# Altium PCB PCB3.PcbDoc
Units mm, origin at the board's own origin, x right, y up, seen from the top; angles counter-clockwise.
Board outline 106 x 106 mm, 2 copper layers (Top Layer, Bottom Layer), stack 2.971 mm thick; 27 components, 45 nets, 204 pads, 52 vias.
Unrouted connection lines stored in the file: 113.
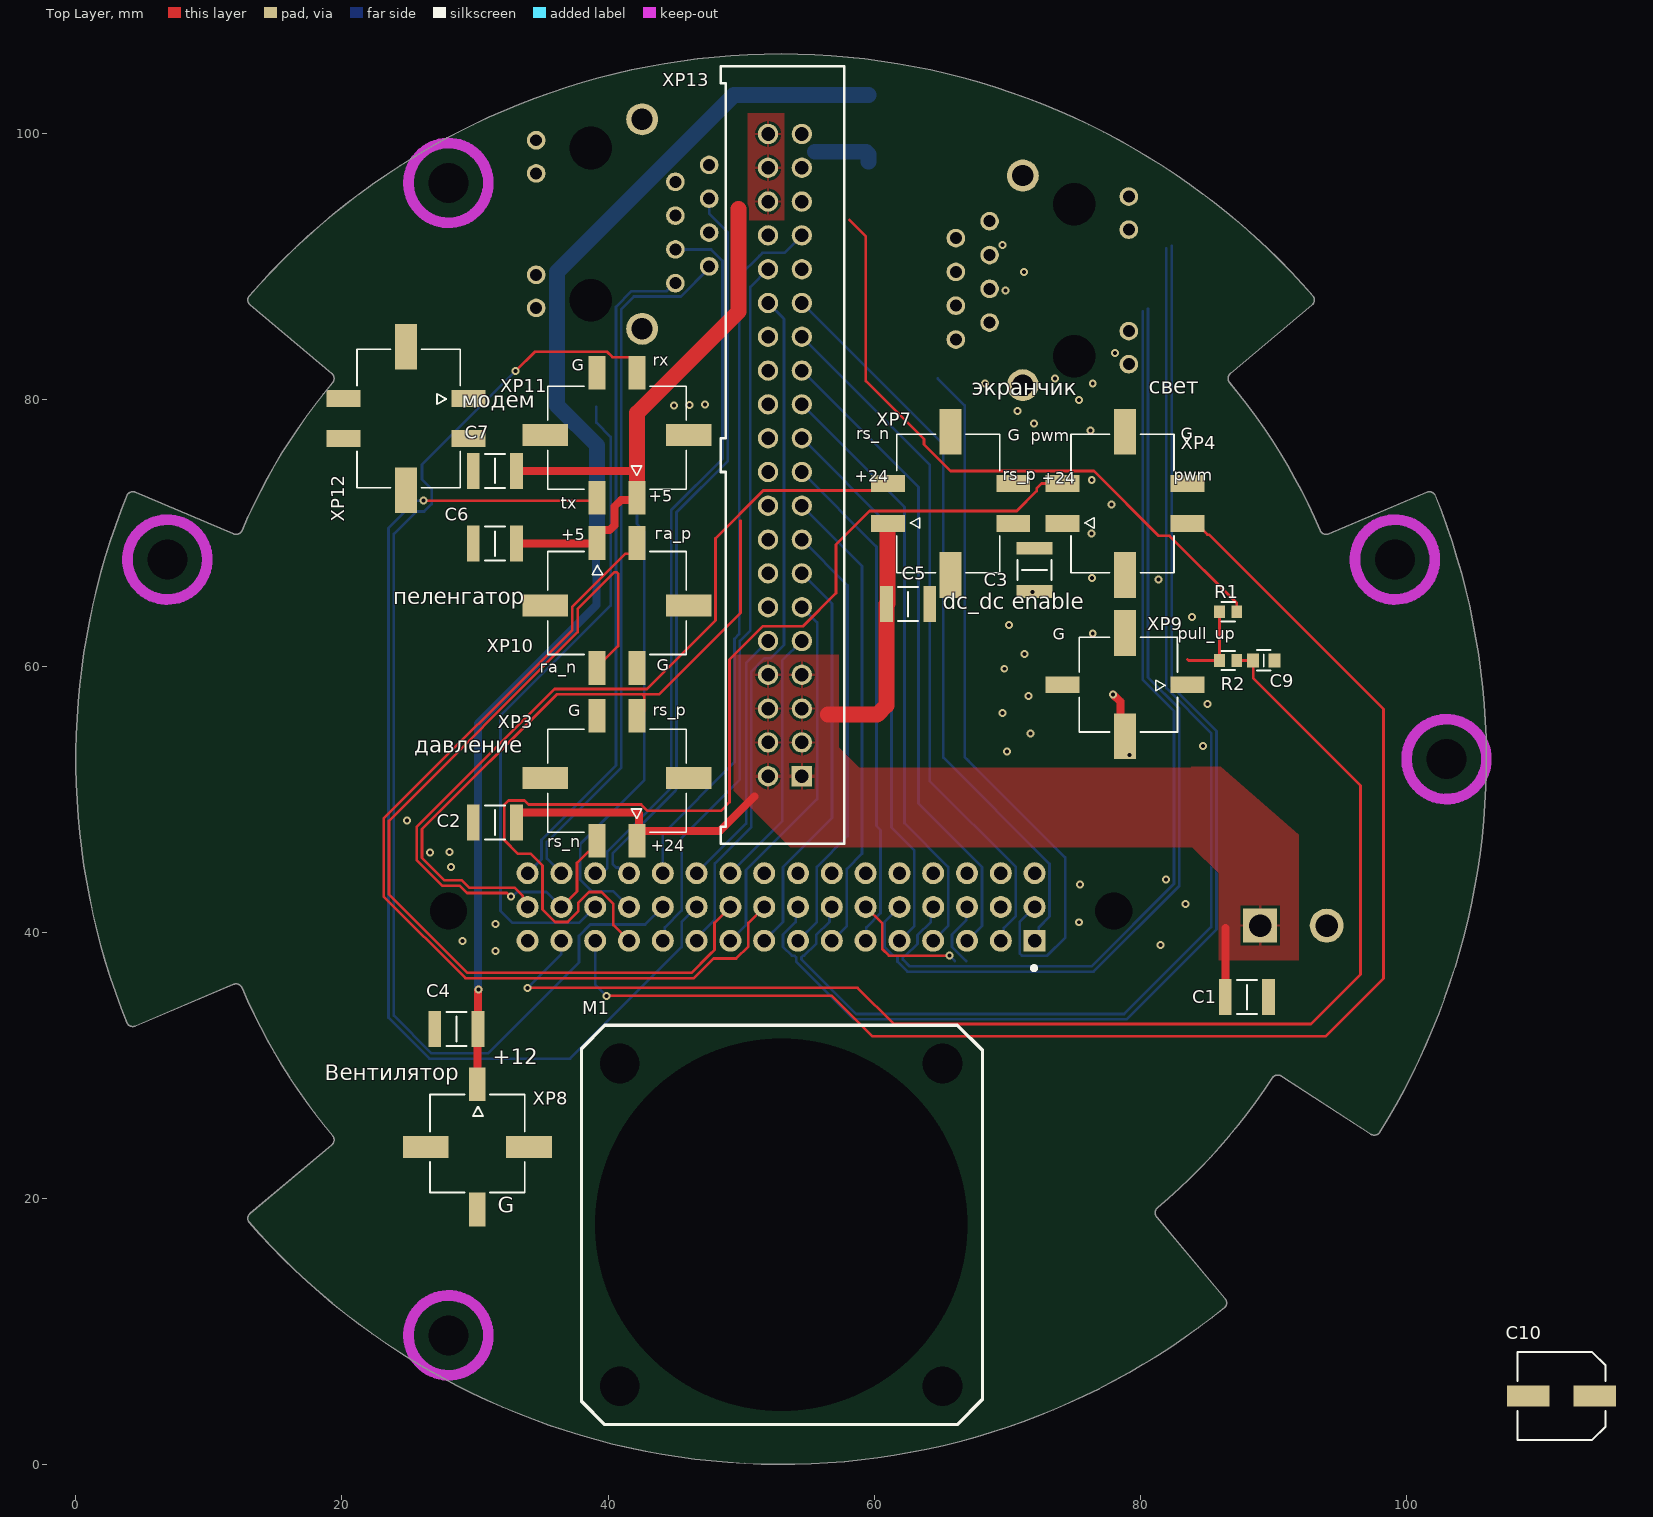
[diagram p0: Top Layer view]
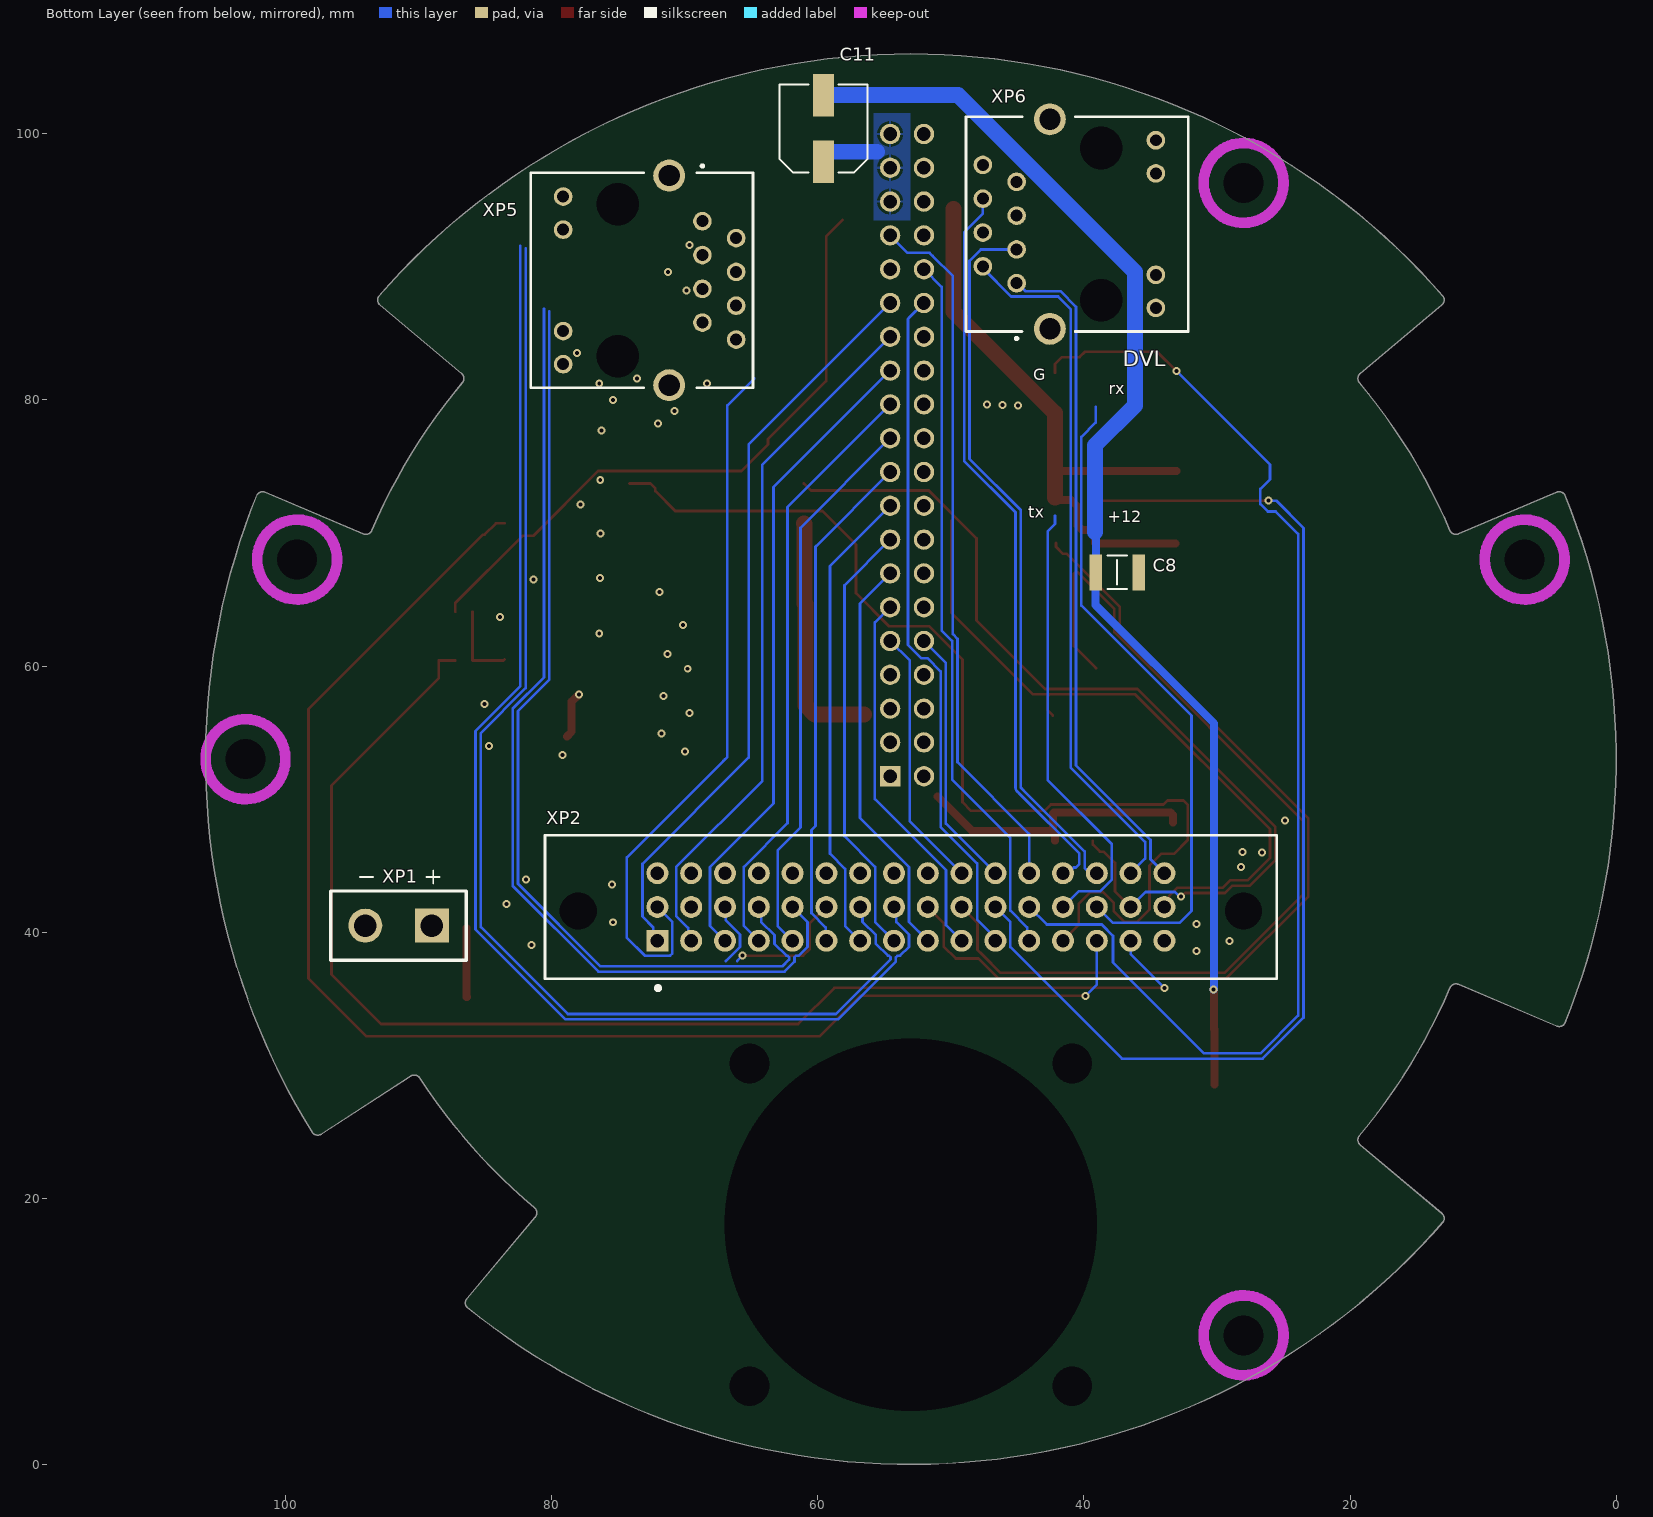
[diagram p1: Bottom Layer view, seen from below]
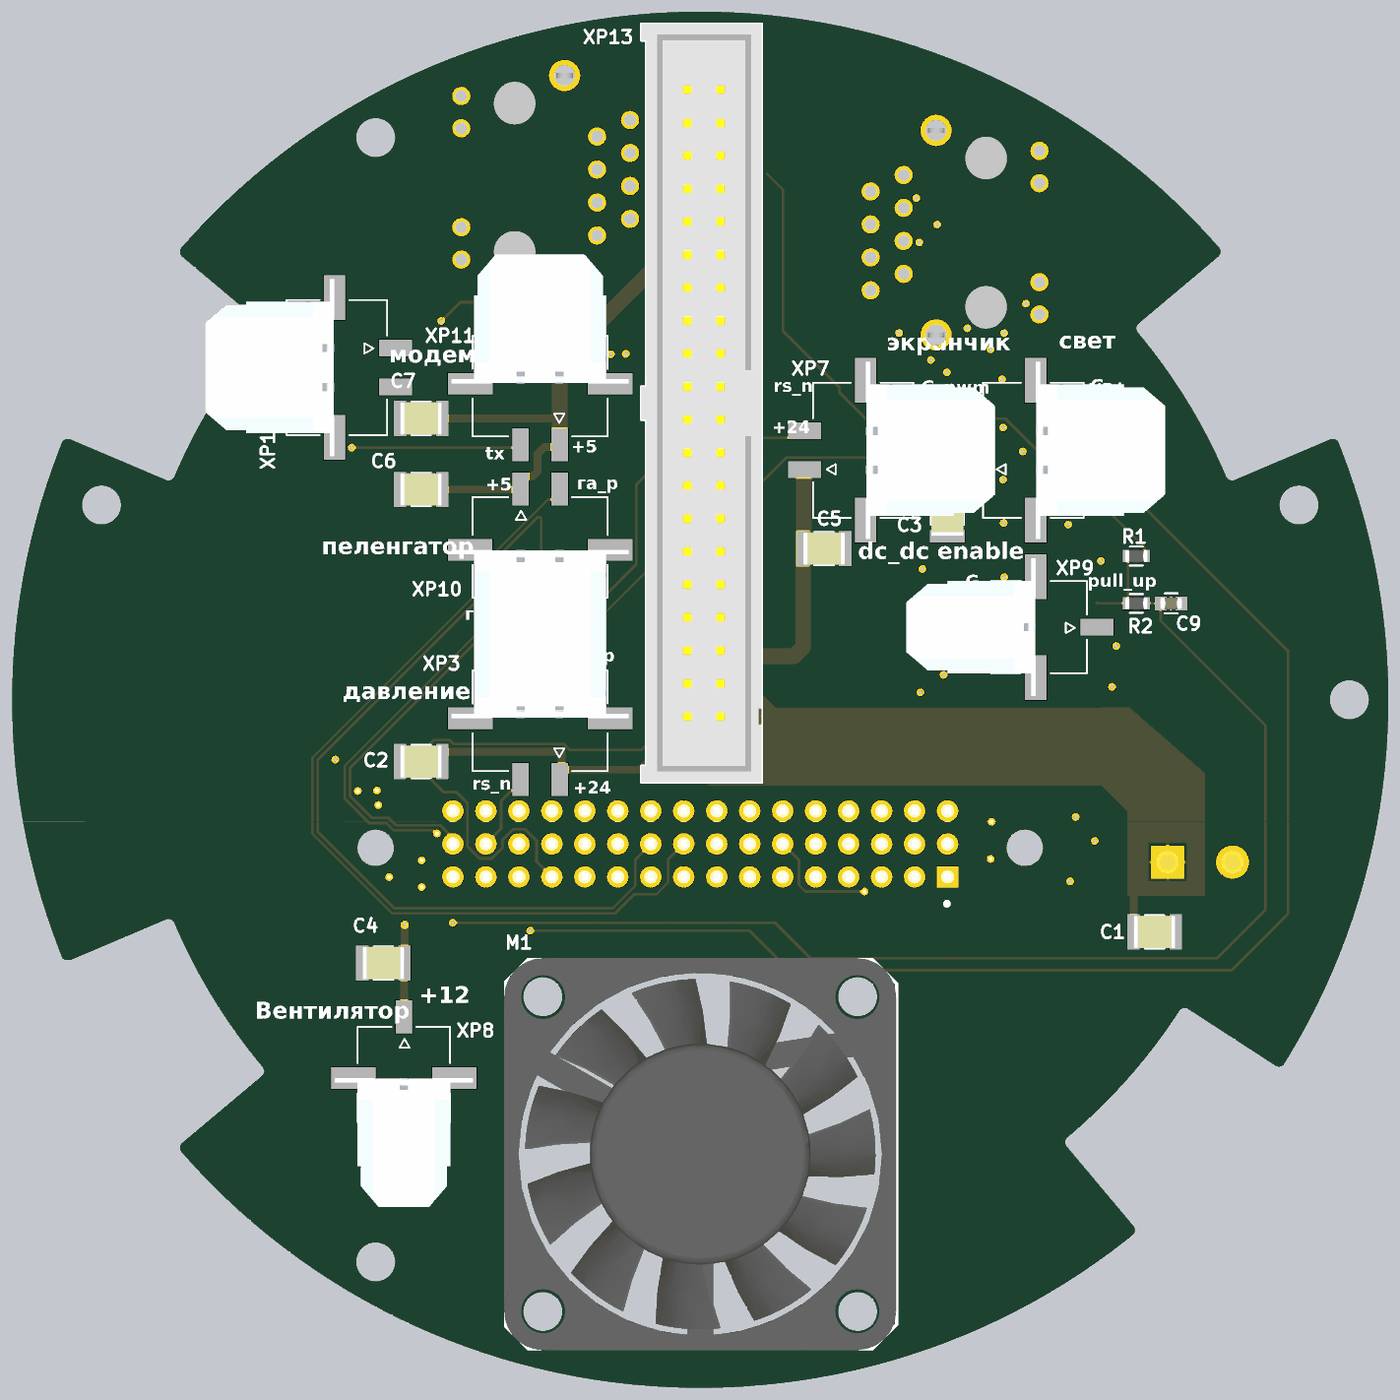
[diagram p2: 3D render of the assembled board from above, using the file's embedded part models]
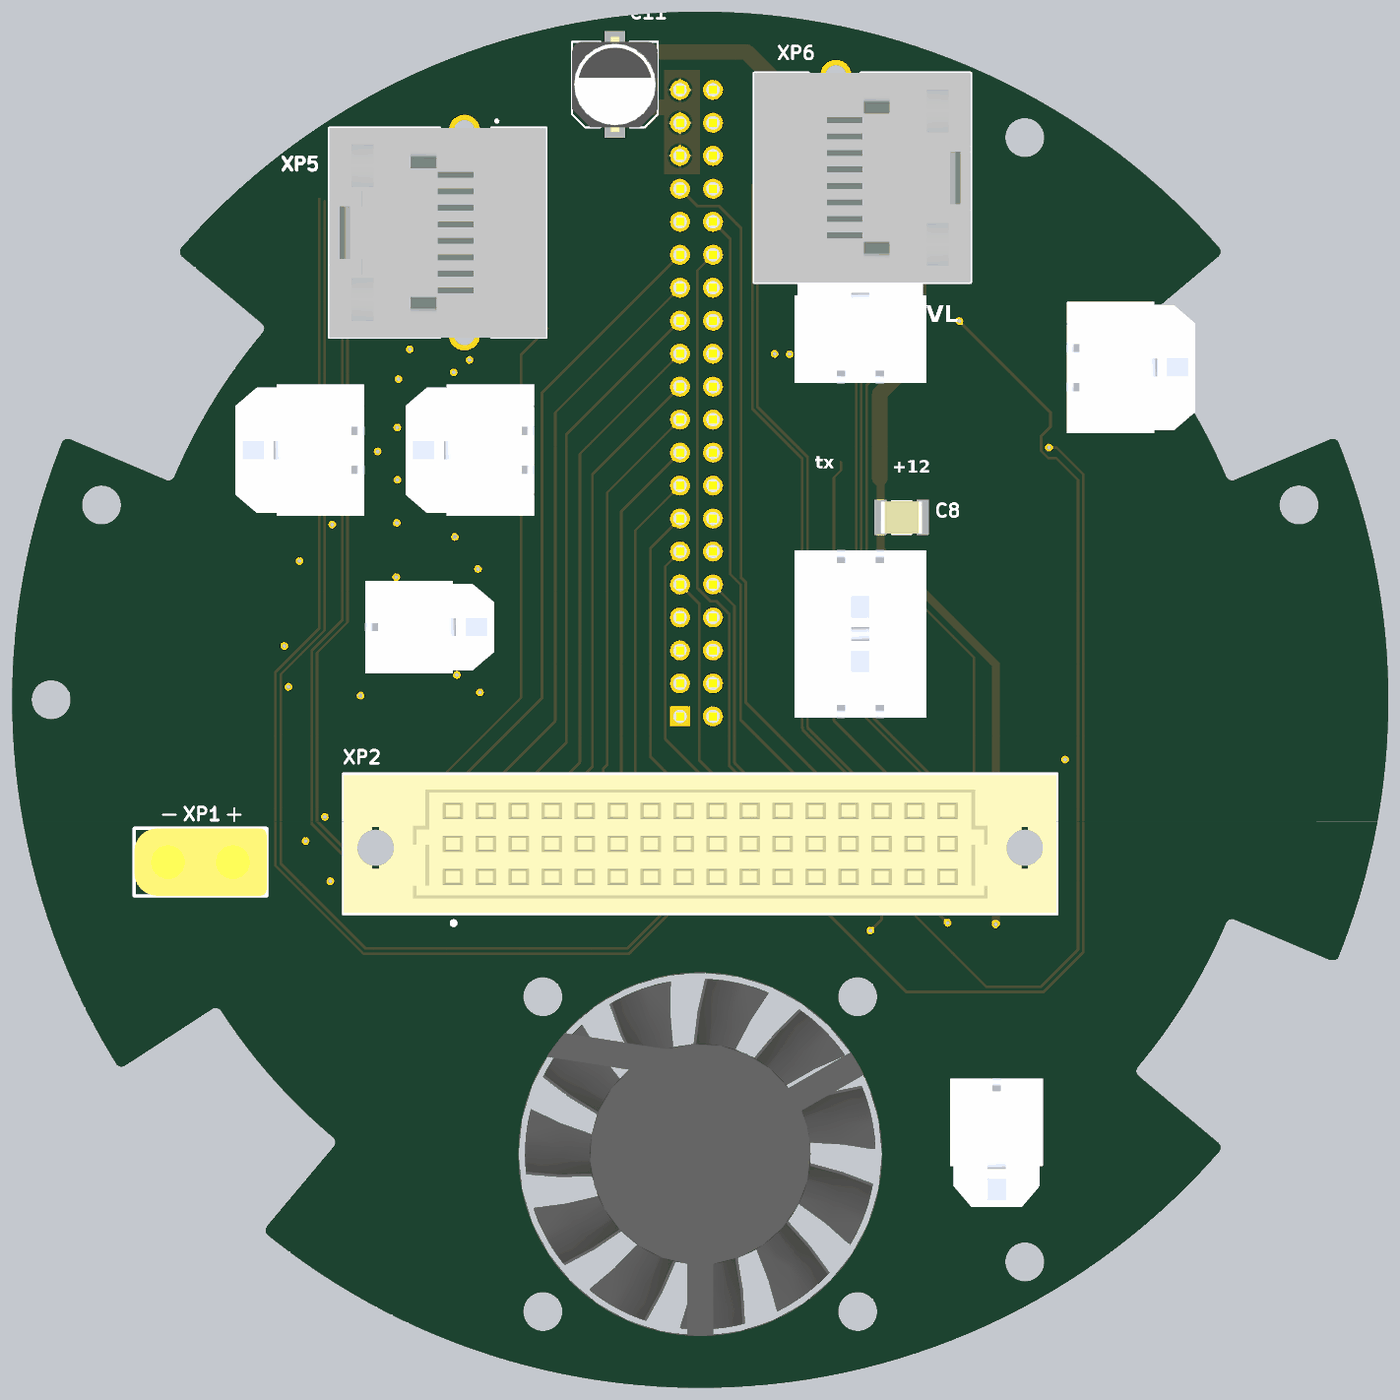
[diagram p3: 3D render of the assembled board from below, using the file's embedded part models]

## Layer stack, top to bottom
Top Solder: solder mask 0.0102, Solder Resist, Dk 3.5
Top Layer: signal copper 0.0356
Dielectric 1: dielectric 2.9, FR-4, Dk 4.8
Bottom Layer: signal copper 0.0356
Bottom Solder: solder mask 0.0102, Solder Resist, Dk 3.5

## Board outline
4.485,32.953 cw(c4.29,33.414) 3.87,33.142 cw(c53.006,53.006) 3.87,72.87 cw(c4.29,72.599) 4.485,73.059 11.849,69.934 ccw(c12.044,70.394) 12.504,70.199 cw(c53.007,53.006) 19.301,81.289 ccw(c18.918,81.61) 19.239,81.993 13.111,87.135 cw(c13.433,87.518) 13,87.77 13,87.769 cw(c53.007,53.006) 93.013,87.77 cw(c92.58,87.518) 92.902,87.135 86.774,81.993 ccw(c87.095,81.61) 86.712,81.289 cw(c53.006,53.006) 93.509,70.199 ccw(c93.969,70.394) 94.164,69.934 101.528,73.059 cw(c101.723,72.599) 102.143,72.87 cw(c53.006,53.006) 97.947,24.912 97.948,24.912 cw(c97.581,25.252) 97.309,24.832 90.6,29.189 ccw(c90.327,28.77) 89.908,29.042 cw(c53.007,53.006) 81.289,19.3 ccw(c81.611,18.917) 81.228,18.596 86.37,12.468 cw(c85.987,12.147) 86.369,11.824 cw(c53.007,53.006) 13,18.243 cw(c13.432,18.494) 13.111,18.877 19.239,24.019 ccw(c18.917,24.402) 19.3,24.724 cw(c53.006,53.006) 12.504,35.814 ccw(c12.044,35.619) 11.849,36.079

## Design rules (kind name [scope] priority, off if disabled: settings)
AcuteAngle [All] p1: minimum=3.50000000000000E+0001 checktracksonly=FALSE
BoardOutlineClearance "BoardOutlineClearance 1" [All] p1: gap=0.25 ignorepadtopadclearanceinfootprint=FALSE except(0: Arc-SplitContinuation Track-SplitContinuation SMDPad-SplitContinuation THPad-SplitContinuation Via-SplitContinuation Fill-SplitContinuation Poly-SplitContinuation Region-SplitContinuation Text-SplitContinuation) // Milling
BoardOutlineClearance "BoardOutlineClearance 2" [All] p2: gap=0.4 ignorepadtopadclearanceinfootprint=FALSE except(0: Arc-SplitContinuation Track-SplitContinuation SMDPad-SplitContinuation THPad-SplitContinuation Via-SplitContinuation Fill-SplitContinuation Poly-SplitContinuation Region-SplitContinuation Text-SplitContinuation) // V-Cut
Clearance "Clearance-1 1 Oz" [All] p1: gap=0.2 ignorepadtopadclearanceinfootprint=FALSE except(0.25: Arc-Hole Track-Hole SMDPad-Hole THPad-Hole Via-Hole Fill-Hole Poly-Hole Region-Hole Text-Hole) // Standart
DiffPairsRouting "DiffPairsRouting 1 Oz" [All] p1: maxlimit=0.254 minlimit=0.2 mostfreqgap=0.254 toplayer_minwidth=0.2 toplayer_maxwidth=0.381 toplayer_prefwidth=0.381 bottomlayer_minwidth=0.2 bottomlayer_maxwidth=0.381 bottomlayer_prefwidth=0.381 maxuncoupledlength=12.7
HoleSize [HasPad('M1-0')] p1: absolutevalues=TRUE maxlimit=50 minlimit=0.025 maxpercent=80.000 minpercent=20.000
HoleSize "Minimum HoleSize" [IsPad] p2: absolutevalues=TRUE maxlimit=5.9 minlimit=0.6 maxpercent=80.000 minpercent=20.000
HoleSize "Minimum HoleSize VIA 1" [IsVia] p3: absolutevalues=TRUE maxlimit=5.9 minlimit=0.3 maxpercent=80.000 minpercent=20.000 // Standart
HoleToHoleClearance Hole2HoleClearance [All] p1: gap=0.25 allowstackedmicrovias=FALSE
MinimumAnnularRing "Minimum AR VIA Standart" [IsVia] p1: minimumring=0.15
MinimumAnnularRing "Minimum AR PAD Standart" [IsPAD] p2: minimumring=0.2
MinimumSolderMaskSliver "SolderMask Bridge Standart" [All] p1: minsoldermaskwidth=0.15 // All Masks
PlaneClearance "PlaneClearance 1 Oz" [All] p1: clearance=0.2
PlaneConnect "TermalConnect-1 1 Oz" [All] p1: planeconnectstyle=Relief reliefexpansion=0.2 reliefentries=4 reliefconductorwidth=0.2 reliefairgap=0.2 // Standart
PolygonConnect "PolygonConnect-1 1 Oz" [All] p1: thpad.connectstyle=Relief thpad.reliefconductorwidth=0.2 thpad.reliefentries=4 thpad.polygonreliefangle="90 Angle" thpad.airgapwidth=0.2 smdpad.connectstyle=Relief smdpad.reliefconductorwidth=0.2 smdpad.reliefentries=4 smdpad.polygonreliefangle="90 Angle" smdpad.airgapwidth=0.2 via.connectstyle=Direct via.reliefconductorwidth=0.254 via.reliefentries=4 via.polygonreliefangle="90 Angle" via.airgapwidth=0.254 // Standart
RoutingCorners [All] p1 off: cornerstyle=45-Degree minsetback=2.54 maxsetback=2.54
RoutingVias [All] p1: holewidth=0.3 width=0.6 viastyle="Through Hole" minholewidth=0.2 minwidth=0.4 maxholewidth=5.9 maxwidth=6.4
SilkToSilkClearance Silk2SilkClearance [All] p1 off: silktosilkclearance=0.15
SilkToSolderMaskClearance Silk2SolderMaskClearance [IsPad] p1 off: minsilkscreentomaskgap=0.15 clearancetoexposedcopper=TRUE
SolderMaskExpansion SolderMaskExpansion-1 [All] p1: expansion=0.05 istentingtop=FALSE // Standart
SupplyNets "Schematic Supply Nets_5" [InNet('+5')] p1: voltage=0.000
SupplyNets "Schematic Supply Nets_4" [InNet('+24_1')] p2: voltage=0.000
SupplyNets "Schematic Supply Nets_3" [InNet('GND')] p3: voltage=0.000
SupplyNets "Schematic Supply Nets_2" [InNet('+24_2')] p4: voltage=0.000
SupplyNets "Schematic Supply Nets_1" [InNet('+12')] p5: voltage=0.000
SupplyNets "Schematic Supply Nets" [InNet('+24')] p6: voltage=0.000
UnRoutedNet [All] p1: checkbadconnections=TRUE
Width "Width 1 Oz" [All] p1: maxlimit=1.2 minlimit=0.2 preferedwidth=0.6 checkconnectedcopper=TRUE
20 further rules are at their usual default settings.

## Classes and differential pairs
differential pair eth6: +eth6_P -eth6_N
differential pair eth5: +eth5_P -eth5_N
differential pair RS485: +RS485_P -RS485_N
differential pair GA: +GA_P -GA_N
differential pair eth4: +eth4_P -eth4_N
differential pair eth3: +eth3_P -eth3_N
differential pair eth2: +eth2_P -eth2_N
differential pair eth1: +eth1_P -eth1_N

## Components (designator, comment, footprint, x,y, rotation, side; value= is the part's Value field where it differs from the comment)
C1 "Capacitor" 1210C 88,35.125 r180 top value="22 мк"
C2 "Capacitor" 1210C 31.5,48.25 r0 top value="22 мк"
C3 "Capacitor" 1210C 72.05,67.225 r90 top value="22 мк"
C4 "Capacitor" 1210C 28.6,32.725 r0 top value="22 мк"
C5 "Capacitor" 1210C 62.55,64.65 r180 top value="22 мк"
C6 "Capacitor" 1210C 31.5,69.2 r0 top value="22 мк"
C7 "Capacitor" 1210C 31.5,74.675 r0 top value="22 мк"
C8 "Capacitor" 1210C 37.5,67.05 r0 bottom value="22 мк"
C9 "Capacitor" 0603C 89.275,60.425 r180 top value="0,1 мк"
C10 "Capacitor" ECAP_SMD_6,6x6,6 111.655,5.15 r180 top value="100 мк"
C11 "Capacitor" ECAP_SMD_6,6x6,6 59.575,100.4 r90 bottom value="100 мк"
M1 "cooler3030" cooler3030 53.006,18.006 r0 top locked
R1 "Resistor" 0603R 86.6,64.075 r180 top value="1,0 к"
R2 "Resistor" 0603R 86.6,60.425 r180 top value="1,0 к"
XP1 "XT30UPB-F" XT30UPB-F 91.506,40.5 r0 bottom locked
XP2 "DIN41612_48_3row_straight_female" DIN41612_48_3row_straight_female 53.006,41.9 r0 bottom locked
XP3 "430450418" MOLEX_430450418 40.675,51.575 r0 top
XP4 "430450418" MOLEX_430450418 78.85,72.225 r270 top
XP5 "1734577-3" 1-1734577-3-rj45-8p8c 68.675,93.43 r90 bottom
XP6 "1734577-3" 1-1734577-3-rj45-8p8c 45.06,88.77 r270 bottom
XP7 "430450418" MOLEX_430450418 65.75,72.225 r270 top
XP8 "430450218" Molex_430450218 30.175,23.875 r180 top
XP9 "430450218" Molex_430450218 78.85,58.6 r90 top
XP10 "430450418" MOLEX_430450418 40.675,64.55 r180 top
XP11 "430450418" MOLEX_430450418 40.675,77.35 r0 top
XP12 "430450418" MOLEX_430450418 24.825,78.6 r90 top
XP13 "IDC_40_Male conector" "IDC_40_Male conector" 53.295,75.855 r90 top locked

## Footprints (in the part's own frame and the unit in brackets; to place one, negate y for a bottom-side part, rotate by r counter-clockwise, add the part's x,y. Pads: shape width x height; smd on the part's side, far side on the other; paste and mask are expansions set on the pad)
1-1734577-3-rj45-8p8c [mm]
  round 1.4 hole 0.9: 1(0,0) 2(-1.27,-2.54) 3(-2.54,0) 4(-3.81,-2.54) 5(-5.08,0) 6(-6.35,-2.54) 7(-7.62,0) 8(-8.89,-2.54) 9(-10.745,10.46) 10(-8.255,10.46) 11(-0.635,10.46) 12(1.855,10.46)
  round 2.4 hole 1.6: MH1(3.43,2.5) MH2(-12.32,2.5)
  round 0 hole 3.2 unplated: MH3(1.27,6.35) MH4(-10.16,6.35)
  silkscreen extent -12.52,-3.8 4.25,12.9, body extent -12.52,-3.8 3.63,12.9, height 16.54
0603C [mm] "Chip Resistor, 2-Leads, Body 1,40x0,80mm, IPC Medium Density"
  rect 0.9x1.05 smd: 1(-0.8,0) 2(0.8,0)
  silkscreen extent -0.5,-0.77 0.5,0.77, body extent -0.85,-0.45 0.85,0.45, height 0.9
0603R [mm] "Chip Resistor, 2-Leads, Body 1.60x0.85mm, IPC Medium Density"
  rect 0.8x0.95 smd: 1(-0.65,0) 2(0.65,0)
  silkscreen extent -0.5,-0.72 0.5,0.72, body extent -0.87,-0.47 0.88,0.48, height 0.9
1210C [mm]
  rect 0.954x2.706 smd paste+0: 1(-1.625,0) 2(1.625,0)
  silkscreen extent -0.75,-1.28 0.75,1.28, body extent -1.6,-1.25 1.6,1.25, height 2.7
cooler3030 [mm]
  round 1.4 hole 3 unplated: 0(-12.125,-12.125) 0(-12.125,12.125) 0(12.125,-12.125) 0(12.125,12.125)
  round 0 hole 28 unplated: 0(0,0)
  silkscreen extent -15,-15 15.13,15, body extent -15.1,-15.1 15.1,15.1, height 6.6
DIN41612_48_3row_straight_female [mm]
  rect 1.65x1.65 hole 1: A1(19.05,2.54)
  round 1.65 hole 1: A2(16.51,2.54) A3(13.97,2.54) A4(11.43,2.54) A5(8.89,2.54) A6(6.35,2.54) A7(3.81,2.54) A8(1.27,2.54) A9(-1.27,2.54) A10(-3.81,2.54) A11(-6.35,2.54) A12(-8.89,2.54) A13(-11.43,2.54) A14(-13.97,2.54) A15(-16.51,2.54) A16(-19.05,2.54) B1(19.05,0) B2(16.51,0) B3(13.97,0) B4(11.43,0) B5(8.89,0) B6(6.35,0) B7(3.81,0) B8(1.27,0) B9(-1.27,0) B10(-3.81,0) B11(-6.35,0) B12(-8.89,0) B13(-11.43,0) B14(-13.97,0) B15(-16.51,0) B16(-19.05,0) C1(19.05,-2.54) C2(16.51,-2.54) C3(13.97,-2.54) C4(11.43,-2.54) C5(8.89,-2.54) C6(6.35,-2.54) C7(3.81,-2.54) C8(1.27,-2.54) C9(-1.27,-2.54) C10(-3.81,-2.54) C11(-6.35,-2.54) C12(-8.89,-2.54) C13(-11.43,-2.54) C14(-13.97,-2.54) C15(-16.51,-2.54) C16(-19.05,-2.54)
  round 2.5 hole 2.8 unplated: ""(-25,0.3) ""(25,0.3)
  silkscreen extent -27.5,-5.4 27.5,6.25, body extent -27.45,-5.3 27.45,5.29, height 11.3
ECAP_SMD_6,6x6,6 [mm]
  rect 3.2x1.6 smd: 1(-2.5,0) 2(2.5,0)
  silkscreen extent -3.3,-3.3 3.3,3.3, body extent -3.65,-3.3 3.65,3.3, height 7.7
"IDC_40_Male conector" [mm] "Connector; IDC"
  rect 1.53x1.53 / inner round 1.53 / far side rect 1.53x1.53 hole 1.02: 1(-24.13,-1.27)
  round 1.53 hole 1.02: 2(-24.13,1.27) 3(-21.59,-1.27) 4(-21.59,1.27) 5(-19.05,-1.27) 6(-19.05,1.27) 7(-16.51,-1.27) 8(-16.51,1.27) 9(-13.97,-1.27) 10(-13.97,1.27) 11(-11.43,-1.27) 12(-11.43,1.27) 13(-8.89,-1.27) 14(-8.89,1.27) 15(-6.35,-1.27) 16(-6.35,1.27) 17(-3.81,-1.27) 18(-3.81,1.27) 19(-1.27,-1.27) 20(-1.27,1.27) 21(1.27,-1.27) 22(1.27,1.27) 23(3.81,-1.27) 24(3.81,1.27) 25(6.35,-1.27) 26(6.35,1.27) 27(8.89,-1.27) 28(8.89,1.27) 29(11.43,-1.27) 30(11.43,1.27) 31(13.97,-1.27) 32(13.97,1.27) 33(16.51,-1.27) 34(16.51,1.27) 35(19.05,-1.27) 36(19.05,1.27) 37(21.59,-1.27) 38(21.59,1.27) 39(24.13,-1.27) 40(24.13,1.27)
  silkscreen extent -29.21,-4.45 29.21,4.82, body extent -29.21,-4.45 29.21,4.83, height 8.89
Molex_430450218 [mm]
  rect 3.43x1.65 smd mask+0.076: 0(-3.885,0) 0(3.885,0)
  rect 1.27x2.54 smd mask+0.076: 1(0,-4.7) 2(0,4.7)
  silkscreen extent -3.56,-3.94 3.56,3.43, body extent -5.33,-5.6 5.33,5.6, height 9.96
MOLEX_430450418 [mm]
  rect 3.43x1.65 smd mask+0.076: 0(-5.385,0) 0(5.385,0)
  rect 1.27x2.54 smd mask+0.076: 1(1.5,-4.7) 2(-1.5,-4.7) 3(1.5,4.7) 4(-1.5,4.7)
  silkscreen extent -5.21,-4.06 5.21,3.68, body extent -6.82,-5.6 6.83,5.6, height 9.96
XT30UPB-F [mm]
  round 2.55 hole 1.7: N(2.5,0)
  rect 2.55x2.55 / inner round 2.55 / far side rect 2.55x2.55 hole 1.7: P(-2.5,0)
  silkscreen extent -5.1,-4.15 5.1,2.6, body extent -5.1,-2.6 5.1,2.6, height 9.4

## Part data
C1 C2 C3 C4 C5 C6 C7 C8: library part Capacitor_22u_10_25V_X7R_1210C, "Конденсатор 1210C ёмкостью 22 мк 10%, 25 В, X7R", Capacity (nF)=22000, Dielectric=X7R, Tolerance=10%, Voltage (V)=25, Part Number=Capacitor_22u_10_25V_X7R_1210C
C9: library part Capacitor_0,1u_10_50V_X7R_0603C, "Конденсатор 0603C ёмкостью 0,1 мк 10%, 50 В, X7R", Capacity (nF)=100, Dielectric=X7R, Tolerance=10%, Voltage (V)=50, Part Number=Capacitor_0,1u_10_50V_X7R_0603C
C10 C11: library part JCK1V101, "Конденсатор алюминиевый электролитический 100мкФ 35В 20% SMD 6,6x6,6 мм", Capacity (uF)=100, Tolerance=20, Voltage (V)=35, Part Number=JCK1V101, Type="SMD Aluminum"
M1: "вентилятор 30*30 с дыркой на плате", Part Number=cooler3030
R1 R2: library part Resistor_1.0k_1_0603, "Резистор номиналом 1,0 кОм 1%", Tolerance=1%, Part Number=Resistor_1.0k_1_0603
XP1: "30 А (15 продолжительно), прямая мать", Value1="эта плюс", Value2="это пинус", Part Number=XT30UPB-F, System=Connector
XP2: "DIN41612R (DS1120-48F0V13), Разъем (розетка) тип B 48pin (3х16), шаг 2.54мм трехрядный прямой (ряд АBC)", Datasheet=https://cdn.promelec.ru/upload/datasheet/3/1/DS1120.pdf, Parameter 1=PWM1, Parameter 2=DSHOT8, Parameter 3=DSHOT9, Parameter 4=DSHOT10, Parameter 5=DSHOT1, Parameter 6=PWM2, Parameter 7=PWM3, Parameter 8=DSHOT2, Parameter 9=DSHOT3, Parameter 10=DSHOT4, Parameter 11=DSHOT6, Parameter 12=DSHOT7, Parameter 13=DSHOT5, Parameter 14=DCDC_EN, Parameter 15=PWM4, Part Number=DIN41612_48_3row_straight_female, System=Connector
XP3 XP7: library part Molex_430450418, "Разъем типа провод-плата, 3 мм, 4 контакт(-ов), Штыревой Разъем, для поверностного монтажа", Value1=Питание, Value2=RS485_P, Value3=RS485_N, Value4=Общий, Part Number=Molex_430450418, System=Connector
XP4: library part Molex_430450418, "Разъем типа провод-плата, 3 мм, 4 контакт(-ов), Штыревой Разъем, для поверностного монтажа", Value1=Питание, Value2=PWM1, Value3=PWM2, Value4=Общий, Part Number=Molex_430450418, System=Connector
XP5 XP6: library part 1-1734577-3-rj45-8p8c, "Модульный разъем, Cat3, RJ45, Гнездо, 8 контакт(-ов), 8 вывод(-ов), 1 порт(-ов)", Part Number=1-1734577-3-rj45-8p8c, System=Connector
XP8: library part Molex_430450218, "Разъем типа провод-плата, 3 мм, 2 контакт(-ов), Штыревой Разъем, Серия Micro-Fit для поверхностного монтажа", Value1=Питание, Value2=Общий, Value3=Корпус, Part Number=Molex_430450218, System=Connector, Value4=Корпус
XP9: library part Molex_430450218, "Разъем типа провод-плата, 3 мм, 2 контакт(-ов), Штыревой Разъем, Серия Micro-Fit для поверхностного монтажа", Value1=Выключатель, Value2=Общий, Value3=Корпус, Part Number=Molex_430450218, System=Connector, Value4=Корпус
XP10: library part Molex_430450418, "Разъем типа провод-плата, 3 мм, 4 контакт(-ов), Штыревой Разъем, для поверностного монтажа", Value1=Питание, Value2=GA_P, Value3=GA_N, Value4=Общий, Part Number=Molex_430450418, System=Connector
XP11 XP12: library part Molex_430450418, "Разъем типа провод-плата, 3 мм, 4 контакт(-ов), Штыревой Разъем, для поверностного монтажа", Value1=Питание, Value2=RX, Value3=TX, Value4=Общий, Part Number=Molex_430450418, System=Connector
XP13: "IDC 40-пиновый разъём прямая вилка", Value1=+24, Value2={Value}, Part Number="IDC_40_Male conector", System=Connector, Value3={Value}, Value4={Value}, Value5={Value}, Value6={Value}, Value7={Value}, Value8={Value}, Value9={Value}, Value10={Value}, Value11={Value}, Value12={Value}, Value13={Value}, Value14={Value}, Value15={Value}, Value16={Value}, Value17={Value}, Value18={Value}, Value19={Value}, Value20={Value}

## Free pads (board coordinates)
  rect 0x0 hole 3 unplated mask+0: 3(6.884,68.006) 3(28.006,9.705) 3(28.006,96.308) 3(99.128,68.006) 3(103.006,53.006)

## Via types
v1: diameter 0.6, hole 0.3, Top Layer to Bottom Layer, 52 vias

## Nets (pads, with @x,y where several pads share a name; then routed paths per layer and width w, separated by ;. In a path a pad name is that pad's centre, name@x,y a point inside that pad or via, vN(x,y) a via of type N, cw(c..) or ccw(c..) an arc to the next point about the centre after c; other vN are vias at no path point)
+5: C6.2 C7.2 C10.2 R1.1 XP10.1 XP11.1 | length 93.9
  Top Layer w0.2: 58.144,93.525 59.378,92.291 59.378,81.422 63.75,77.05 63.75,76.646 65.736,74.66 76.514,74.66 81.384,69.79 82.189,69.79 87.246,64.733 87.246,64.079 R1.1
  Top Layer w0.6: C7.2@33.05,74.675 C7.2 42.175,74.675 ; C6.2 XP10.1@39.1,69.2 ; XP10.1 39.175,69.885 39.51,70.22 40.124,70.22 40.475,70.571 40.475,71.975 40.992,72.492 41.84,72.492 41.999,72.65 XP11.1
  Top Layer w1.2: XP11.1 42.175,74.675 42.175,79.014 49.803,86.642 49.803,94.347
+12: C4.2 C8.2 C11.2 XP8.1 XP12.1 | length 94.9
  Top Layer w0.6: XP8.1 30.2,28.6 30.2,32.7 C4.2 30.225,35.675 v1(30.25,35.7)
  Bottom Layer w0.6: v1(30.25,35.7) 30.225,35.725 30.225,55.7 39.125,64.6 C8.2 39.1,67.075 39.1,70.05 39.125,70.075
  Bottom Layer w1.2: 39.175,70.075 39.175,71.3 39.175,76.575 36.175,79.575 36.175,89.626 49.449,102.9 C11.2
+24: C1.2 C2.2 C3.2 C5.2 XP1.P XP3.1 XP4.1 XP7.1 XP13.1 XP13.2 XP13.3 XP13.4 XP13.5 XP13.6 XP13.7 XP13.8 | length 44.6
  Top Layer w0.6: C2.2@33.325,48.25 33.325,48.823 33.502,49 42.241,49 42.335,48.906 XP3.1@42.335,47.625 ; XP3.1 XP3.1@42.175,47.29 ; XP3.1@42.51,47.625 48.425,47.625 51.018,50.218 ; C1.2 86.4,35.15 86.4,35.375 86.4,40.3
  Top Layer w1.2: 56.525,56.35 60.222,56.35 60.925,57.053 C5.2 ; C5.2 60.988,64.713 60.988,70.69 61.023,70.725 XP7.1
+24_1: XP2.C11 XP13.10 | length 19.7
  Bottom Layer w0.2: XP2.C11 50.375,48.159 50.375,60.235 XP13.10
+24_2: XP2.C10 XP13.9 | length 19.7
  Bottom Layer w0.2: XP2.C10 53.09,48.334 53.09,60.41 XP13.9
DCDC_EN: C9.2 R2.1 XP2.A15 | length 98
  Top Layer w0.2: v1(33.95,35.825) 58.76,35.825 61.482,33.103 92.816,33.103 96.55,36.837 96.55,51.025 88.475,59.1 C9.2 R2.1
  Bottom Layer w0.2: v1(33.95,35.825) 36.496,38.371 XP2.A15
DSHOT1: XP2.A10 XP13.11 | length 28.2
  Bottom Layer w0.2: XP2.A10 50.372,40.536 50.372,44.667 55.711,50.006 55.711,63.279 XP13.11
DSHOT2: XP2.A9 XP13.13 | length 30.6
  Bottom Layer w0.2: XP2.A9 53.151,40.775 53.151,44.906 56.825,48.58 56.825,64.705 XP13.13
DSHOT3: XP2.A8 XP13.15 | length 33.1
  Bottom Layer w0.2: XP2.A8 55.691,40.775 55.691,44.906 58,47.215 58,66.07 XP13.15
DSHOT4: XP2.A7 XP13.17 | length 35.5
  Bottom Layer w0.2: XP13.17 59.09,67.52 59.09,45.906 57.941,44.757 57.941,40.485 XP2.A7
DSHOT5: XP2.A6 XP13.19 | length 38.1
  Bottom Layer w0.2: XP13.19 60.116,69.034 60.175,68.975 60.175,47.993 60.481,47.687 60.481,41.434 59.415,40.368 59.415,39.419 XP2.A6
DSHOT6: XP2.A5 XP13.21 | length 41.7
  Bottom Layer w0.2: XP13.21 61.3,70.39 61.3,47.876 63.021,46.155 63.021,40.485 XP2.A5
DSHOT7: XP2.A4 XP13.23 | length 45.3
  Bottom Layer w0.2: XP13.23 62.275,71.955 62.275,48.192 65.561,44.906 65.561,40.485 XP2.A4
DSHOT8: XP2.A3 XP13.25 | length 48.9
  Bottom Layer w0.2: XP13.25 63.325,73.445 63.325,49.682 68.101,44.906 68.101,40.485 XP2.A3
DSHOT9: XP2.A2 XP13.27 | length 52.5
  Bottom Layer w0.2: XP13.27 64.175,75.135 64.175,51.372 70.641,44.906 70.641,41.216 69.746,40.321 69.746,39.59 XP2.A2
DSHOT10: XP2.A1 XP13.29 | length 56.1
  Bottom Layer w0.2: XP13.29 65.2,76.65 65.2,53.125 73.181,45.144 73.181,41.181 72.368,40.368 72.368,39.672 XP2.A1
Enable: XP2.C12 XP13.33 | length 53.2
  Bottom Layer w0.2: XP2.C12 44.116,47.391 49.5,52.775 49.5,62.049 49.85,62.399 49.85,89.3 51.375,90.825 51.6,91.05 53.25,91.05 XP13.33
eth1_N: XP2.B2 XP5.2
eth1_P: XP2.B1 XP5.1 | length 54
  Bottom Layer w0.2: 64.775,81.609 66.8,79.584 66.8,53.166 66.975,52.99 67.092,52.874 ccw(c67.376,53.156) 67.093,52.873 74.35,45.616 74.35,39.58 73.005,38.235 71.107,38.235 70.931,38.411 70.931,40.775 XP2.B1
eth2_N: XP2.B6 XP5.6 | length 9.5
  Top Layer w0.2: XP2.B6 60.612,40.644 60.612,38.912 60.607,38.907 60.607,38.741 61.113,38.235 v1@65.66,38.235
  Bottom Layer w0.2: v1(65.661,38.236) 66.061,37.835
eth2_P: XP2.B3 XP5.3 | length 5
  Bottom Layer w0.2: 66.91,37.835 65.851,38.894 65.851,39.826 66.917,40.892 66.917,41.841 XP2.B3
eth3_N: XP2.B5 XP5.5 | length 73.6
  Bottom Layer w0.2: XP2.B5 60.771,40.775 60.771,38.894 61.43,38.235 61.639,38.235 61.756,38.118 61.756,37.786 62.508,37.035 76.482,37.035 82.925,43.478 82.925,56.795 80.575,59.145 80.575,86.842
eth3_P: XP2.B4 XP5.4 | length 72.1
  Bottom Layer w0.2: XP2.B4 64.26,41.724 64.26,40.775 63.26,39.775 63.26,39.133 62.362,38.235 62.273,38.235 62.156,38.118 62.156,37.952 62.673,37.435 76.316,37.435 82.525,43.644 82.525,56.629 80.175,58.979 80.175,86.676
eth4_N: XP2.B8 XP5.8 | length 94.1
  Bottom Layer w0.2: XP2.B8 54.1,41.724 54.1,40.775 53.151,39.826 53.151,38.894 53.81,38.235 54.019,38.235 54.136,38.118 54.136,37.786 58.473,33.45 78.956,33.45 85.725,40.219 85.725,55.126 82.35,58.501 82.35,91.575
eth4_P: XP2.B7 XP5.7 | length 92.6
  Bottom Layer w0.2: XP2.B7 56.64,41.724 56.64,40.775 55.64,39.775 55.64,39.133 54.742,38.235 54.653,38.235 54.536,38.118 54.536,37.952 58.638,33.85 78.791,33.85 85.325,40.384 85.325,54.961 81.95,58.336 81.95,91.409
eth5_N: XP2.C15 XP6.2 | length 53.2
  Bottom Layer w0.2: XP2.C15 35.4,45.536 35.4,46.775 41,52.375 41,86.825 41.944,87.769 45.473,87.769 47.6,89.896 XP6.2
eth5_P: XP2.C16 XP6.1 | length 50.5
  Bottom Layer w0.2: XP2.C16 35,45.484 35,46.941 40.6,52.541 40.6,86.991 41.778,88.169 44.413,88.169 45.014,88.77 XP6.1
eth6_N: XP2.C13 XP6.6 | length 55.6
  Bottom Layer w0.2: XP2.C13 41.184,44.44 40.765,44.859 40.616,44.859 40.35,45.125 40.35,45.9 44.857,50.407 44.975,50.525 ccw(c44.55,50.949) 45.15,50.949 45.15,71.56 49,75.41 49,92.594 47.6,93.994 XP6.6
eth6_P: XP2.C14 XP6.3 | length 54.2
  Bottom Layer w0.2: XP2.C14 39.313,44.717 39.833,44.717 39.95,44.835 39.95,46.066 44.574,50.69 ; 44.575,50.69 44.692,50.807 ccw(c44.55,50.949) 44.75,50.949 44.75,71.726 48.6,75.576 48.6,90.454 47.744,91.31 XP6.3
GA_N: XP2.B10 XP10.3 | length 70.7
  Top Layer w0.2: XP10.3@39.1,59.85 40.761,61.511 40.761,66.946 40.644,67.063 40.478,67.063 37.72,64.305 37.72,62.552 23.54,48.372 23.54,42.853 29.444,36.95 46.284,36.95 47.642,38.308 48,38.666 48,40.704 XP2.B10
GA_P: XP2.B9 XP10.2 | length 69
  Top Layer w0.2: XP10.2@42.1,69.25 42.1,68.967 41.565,68.432 41.282,68.432 37.32,64.47 37.32,62.717 23.14,48.538 23.14,42.687 29.278,36.55 46.45,36.55 47.925,38.025 49.633,38.025 50.546,38.938 50.546,40.71 XP2.B9
GND: C1.1 C2.1 C3.1 C4.1 C5.1 C6.1 C7.1 C8.1 C9.1 XP1.N XP2.C1 XP2.C2 XP2.C3 XP2.C4 XP2.C5 XP2.C6 XP2.C7 XP2.C8 XP2.C9 XP3.0 XP3.4 XP4.0 XP4.4 XP7.0 XP7.4 XP8.0 XP8.2 XP9.0 XP9.2 XP10.0 XP10.4 XP11.0 XP11.4 XP12.0 XP12.4 XP13.12 XP13.14 XP13.16 XP13.18 XP13.20 XP13.22 XP13.24 XP13.26 XP13.28 XP13.31 XP13.34 | length 3.5
  Top Layer w0.6: v1(77.95,57.875) 78.495,57.33 78.495,55.07 XP9.0@78.85,54.715
  other v1: 31.55,38.575 81.5,39.025 29.05,39.35 31.55,40.625 75.375,40.75 83.4,42.125 75.45,43.6 81.925,43.975 28.2,44.9 26.625,45.975 28.1,46.025 24.9,48.4 79.175,53.325 69.975,53.575 84.725,54 71.75,54.925 69.65,56.475 85.05,57.15 71.6,57.75 69.775,59.8 71.3,60.9 76.425,62.45 70.125,63.075 83.875,63.7 71.9,65.55 81.35,66.5 76.375,66.625 76.338,69.951 77.85,72.125 76.35,73.975 76.25,77.7 72,78.225 70.775,79.175 44.95,79.6 46.125,79.625 47.275,79.65 75.375,80 68.325,81.25 76.425,81.25 73.579,81.629 78.1,83.525 69.878,88.229 71.258,89.607 69.653,91.654
NetC10_1: C10.1 XP13.36 XP13.38 XP13.40
NetC11_1: C11.1 XP13.35 XP13.37 XP13.39 | length 4.7
  Bottom Layer w1.2: 55.55,98.65 59.375,98.65 59.575,98.45 C11.1
NetR1_2: R1.2 R2.2 XP9.1 | length 6.1
  Top Layer w0.2: 83.55,60.5 83.625,60.425 R2.2 R1.2
PWM1: XP2.A11 XP13.30 | length 51.4
  Bottom Layer w0.2: XP2.A11 46.656,39.581 48.022,40.947 48.022,45.172 50.775,47.925 50.775,59.601 51.764,60.59 52.236,60.59 53.225,61.579 53.225,86.085 53.166,86.144 XP13.30
PWM2: XP2.A12 XP13.32 | length 53.7
  Bottom Layer w0.2: XP2.A12 44.268,39.512 44.268,40.368 45.531,41.631 45.531,47.096 49.9,51.465 49.9,61.884 50.7,62.684 50.7,88.5 XP13.32
PWM3: XP2.A13 XP4.2 | length 81.4
  Top Layer w0.2: XP2.A13 40.4,40.536 40.4,42.127 39.502,43.025 38.57,43.025 37.766,42.221 37.766,41.579 36.962,40.775 36.03,40.775 35.081,41.724 35.081,45.015 34.202,45.894 33.227,45.894 32.208,46.913 32.208,49.587 32.524,49.903 33.726,49.903 34.029,49.6 42.49,49.6 42.965,49.125 48.475,49.125 49.125,49.775 49.125,60.491 51.619,62.985 54.632,62.985 57.126,65.48 57.126,69.13 59.656,71.66 70.714,71.66 72.212,73.158 72.212,73.357 72.58,73.725 XP4.2
PWM4: XP2.A14 XP4.3 | length 106.7
  Top Layer w0.2: v1(39.9,35.225) 56.82,35.225 59.87,32.175 93.925,32.175 98.275,36.525 98.275,56.775 85.173,69.877 85.033,69.877 84.185,70.725 XP4.3
  Bottom Layer w0.2: XP2.A14 39.036,36.089 v1(39.9,35.225)
RS485_N: XP2.B15 XP3.2 XP7.2 | length 71.2
  Top Layer w0.2: v1(32.725,42.7) 32.658,42.7 32.408,42.95 29.4,42.95 28.85,43.5 27.536,43.5 25.625,45.411 25.625,47.925 35.98,58.28 42.934,58.28 48.075,63.421 48.075,69.601 51.664,73.19 60.515,73.19 XP7.2 ; XP2.B15 37.672,43.076 37.672,45.212 38.517,46.057 38.8,46.057 39.335,46.592 XP3.2@39.335,46.875
  Bottom Layer w0.2: v1(32.725,42.7) 32.833,42.7 33.158,43.025 35.371,43.025 XP2.B15
RS485_P: XP2.B16 XP3.3 XP7.3 | length 51.5
  Top Layer w0.2: XP2.B16 33.956,42.292 33.595,42.653 33.595,42.73 32.975,43.35 29.566,43.35 29.016,43.9 27.701,43.9 26.025,45.576 26.025,47.759 36.146,57.88 42.593,57.88 42.71,57.763 42.71,56.65 XP3.3@42.335,56.275 ; 42.375,57.88 43.846,57.88 49.95,63.984 49.95,70.725 49.95,70.91
UART2_RX: XP2.B14 XP12.3 | length 49.7
  Bottom Layer w0.2: XP2.B14 37.836,40.7 32.825,40.7 31.925,41.6 31.925,56.275 40.2,64.55 40.2,77.225 39.125,78.3 39.125,79.475
UART2_TX: XP2.B13 XP12.2 | length 34.1
  Bottom Layer w0.2: XP2.B13 40.4,43.076 38.809,43.076 37.911,43.974 37.911,46.611 42.71,51.41 42.71,70.136 42.175,70.671 42.175,71.3
UART5_RX: XP2.B12 XP11.3 | length 91
  Top Layer w0.2: v1(33.05,82.175) 34.495,83.62 39.934,83.62 40.334,83.22 41.64,83.22 42.175,82.685 XP11.3
  Bottom Layer w0.2: v1(33.05,82.175) 26.025,75.15 26.025,74.028 26.751,73.302 26.751,72.18 26.188,71.617 25.59,71.617 23.9,69.926 23.9,33.741 26.741,30.9 30.981,30.9 37.813,37.733 37.813,39.728 38.664,40.579 42.795,40.579 XP2.B12
UART5_TX: XP2.B11 XP11.2 | length 83.7
  Top Layer w0.2: v1(26.151,72.429) 38.954,72.429 XP11.2
  Bottom Layer w0.2: v1(26.151,72.429) 26.149,72.426 25.551,72.426 23.5,70.375 23.5,33.575 26.575,30.5 37.137,30.5 45.531,38.894 45.531,39.826 ; 45.532,39.827 45.532,40.776 XP2.B11
pads on no net: M1.0 XP2. XP2.A16 XP5.9 XP5.10 XP5.11 XP5.12 XP5.MH1 XP5.MH2 XP5.MH3 XP5.MH4 XP6.4 XP6.5 XP6.7 XP6.8 XP6.9 XP6.10 XP6.11 XP6.12 XP6.MH1 XP6.MH2 XP6.MH3 XP6.MH4

## Polygon pours and split planes (outlines as drawn)
NetC10_1 on Top Layer "NETC10_1_L01_P006" (solid, pour order 6): 53.25,101.525 50.5,101.525 50.5,93.5 53.25,93.5
+24 on Top Layer "+24_L01_P000" (solid, pour order 0): 57.35,60.85 49.375,60.85 49.375,50.675 57.35,50.675
+24 on Top Layer "+24_L01_P003" (solid, pour order 3): 49.377,52.376 49.375,50.675 53.675,46.375 56.864,46.375 56.775,52.376
+24 on Top Layer "+24_L01_P001" (solid, pour order 1): 54.95,46.375 84.05,46.375 84.05,52.375 54.95,52.375
+24 on Top Layer "+24_L01_P005" (solid, pour order 5): 83.825,52.425 86.057,52.425 91.9,47.332 91.9,44.23 91.9,37.9 85.9,37.9 85.9,44.442 83.825,46.458
+24 on Top Layer "+24_L01_P004" (solid, pour order 4): 59.925,51.3 57.15,54.075 57.15,51.3
NetC11_1 on Bottom Layer "NETC11_1_L02_P008" (solid, pour order 8): 55.79,101.525 53.04,101.525 53.04,93.5 55.79,93.5

## Keep-outs
Keep-Out Layer:
  circle w0.8: c28.006,96.308 r3
  circle w0.8: c6.884,68.006 r3
  circle w0.8: c28.006,9.705 r3
  circle w0.8: c103.006,53.006 r3
  circle w0.8: c99.128,68.006 r3

## Silkscreen, mask and mechanical layers (free items; w line width, h text height)
Top Overlay:
  text "rx" at 43.375,82.275 h1.5
  text "G" at 37.275,81.888 h1.5
  text "свет" at 80.625,80.068 h2
  text "экранчик" at 67.35,79.929 h2
  text "модем" at 29.025,78.984 h2
  text "rs_n" at 58.65,76.733 h1.5
  text "G" at 83.056,76.734 h1.5
  text "G" at 70.025,76.638 h1.5
  text "pwm" at 71.775,76.609 h1.5
  text "rs_p" at 69.675,73.659 h1.5
  text "pwm" at 82.5,73.609 h1.5
  text "+24" at 58.525,73.55 h1.5
  text "+24" at 72.6,73.4 h1.5
  text "+5" at 43.05,72.063 h1.5
  text "tx" at 36.45,71.538 h1.5
  text "га_p" at 43.5,69.234 h1.5
  text "+5" at 36.475,69.138 h1.5
  text "пеленгатор" at 23.85,64.229 h2
  text "dc_dc enable" at 65.15,63.853 h2
  text "pull_up" at 82.825,61.709 h1.5
  text "G" at 73.425,61.663 h1.5
  text "G" at 43.65,59.363 h1.5
  text "га_n" at 34.875,59.183 h1.5
  text "rs_p" at 43.375,55.959 h1.5
  text "G" at 37,55.938 h1.5
  text "давление" at 25.45,53.059 h2
  text "rs_n" at 35.425,46.083 h1.5
  text "+24" at 43.2,45.775 h1.5
  text "+12" at 31.35,29.65 h2
  text "Вентилятор" at 18.7,28.454 h2
  text "G" at 31.7,18.518 h2
Bottom Overlay:
  text "DVL" at 37.075,82.1 h2
  text "G" at 43.825,81.188 h1.5
  text "rx" at 38.15,80.125 h1.5
  text "tx" at 44.175,70.838 h1.5
  text "+12" at 38.225,70.5 h1.5
Mechanical 1:
  circle w0.013: c53.006,53.006 r3.125
  circle w0.013: c6.884,68.006 r1.5
  circle w0.013: c65.131,5.881 r1.5
  circle w0.013: c53.006,18.006 r14
  circle w0.013: c28.006,96.308 r1.5
  circle w0.013: c28.006,9.705 r1.5
  circle w0.013: c103.006,53.006 r1.5
  circle w0.013: c65.131,30.131 r1.5
  circle w0.013: c40.881,30.131 r1.5
  circle w0.013: c40.881,5.881 r1.5
  circle w0.013: c99.128,68.006 r1.5
  lines w0.005: 80.45,37.9 93.75,37.9 ; 94.006,40.5 97.948,40.5 ; 97.947,24.912 97.947,40.5 ; 97.947,40.5 97.948,40.5
  lines w0.013: 97.948,24.912 cw(c97.581,25.252) 97.309,24.832 90.6,29.189 ccw(c90.327,28.77) 89.908,29.042 cw(c53.007,53.006) 81.289,19.3 ccw(c81.611,18.917) 81.228,18.596 86.37,12.468 cw(c85.987,12.147) 86.369,11.824 cw(c53.007,53.006) 13,18.243 cw(c13.432,18.494) 13.111,18.877 19.239,24.019 ccw(c18.917,24.402) 19.3,24.724 cw(c53.006,53.006) 12.504,35.814 ccw(c12.044,35.619) 11.849,36.079 4.485,32.953 cw(c4.29,33.414) 3.87,33.142 cw(c53.006,53.006) 3.87,72.87 cw(c4.29,72.599) 4.485,73.059 11.849,69.934 ccw(c12.044,70.394) 12.504,70.199 cw(c53.007,53.006) 19.301,81.289 ccw(c18.918,81.61) 19.239,81.993 13.111,87.135 cw(c13.433,87.518) 13,87.77 cw(c53.007,53.006) 93.013,87.77 cw(c92.58,87.518) 92.902,87.135 86.774,81.993 ccw(c87.095,81.61) 86.712,81.289 cw(c53.006,53.006) 93.509,70.199 ccw(c93.969,70.394) 94.164,69.934 101.528,73.059 cw(c101.723,72.599) 102.143,72.87 cw(c53.006,53.006) 97.947,24.912